# EAGLE board esquema_gps_usb (EAGLE 5.11)
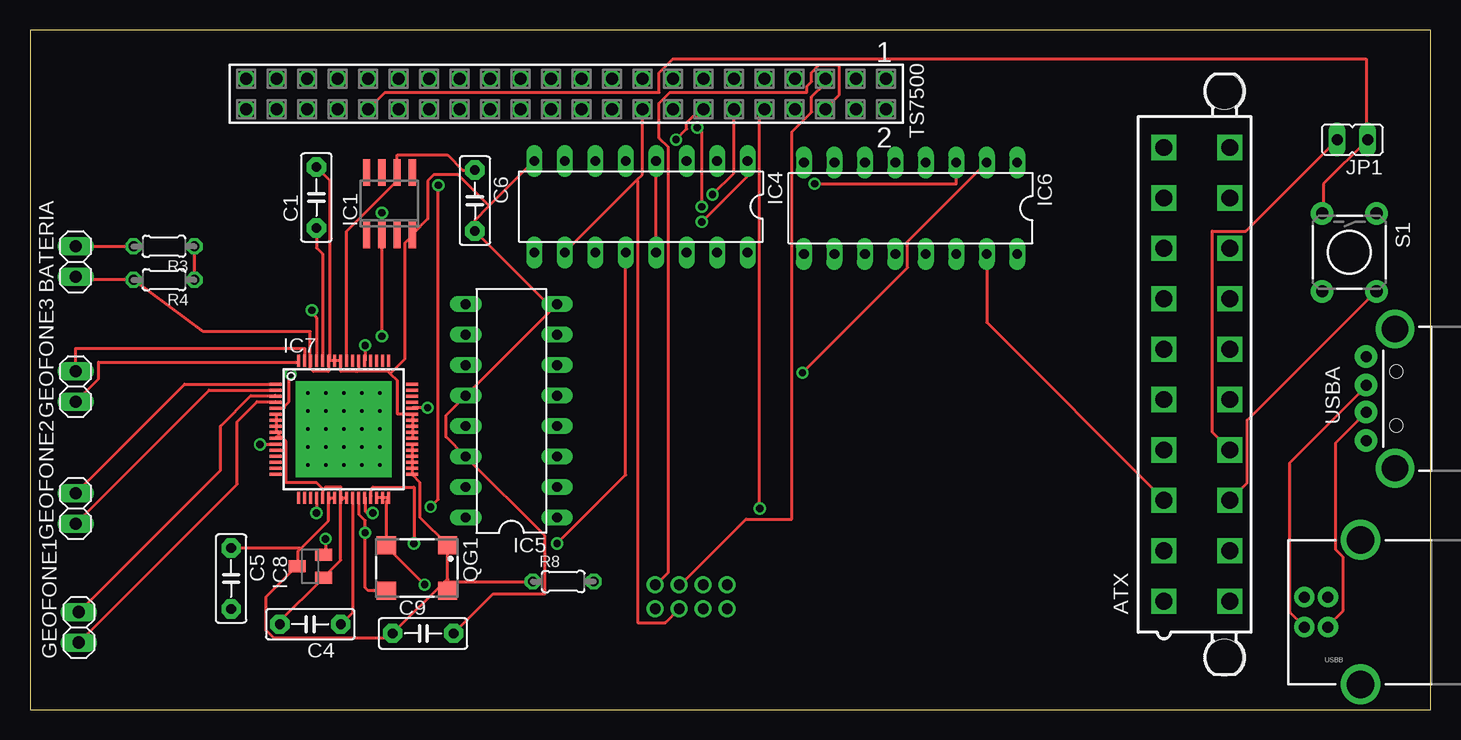
[diagram p0: board, top side]
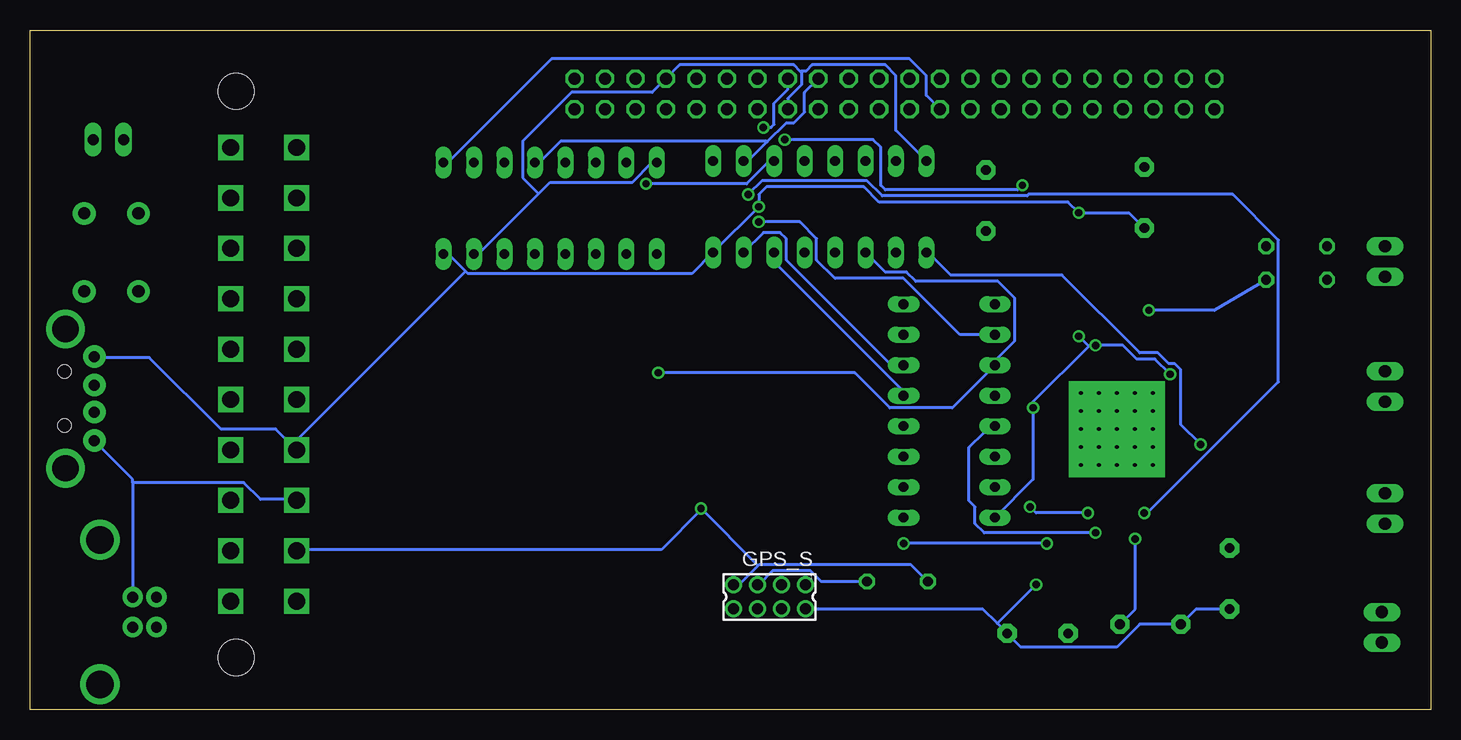
[diagram p1: board, bottom side, seen from below]

Size 116.76 x 56.63 mm. Coordinates in mm from the lower left corner, seen from the top.
Outline: 0,0 116.76,0 116.76,56.63 0,56.63 0,0
Copper layers (1*16): Top 0.035mm / dielectric 1.5mm / Bottom 0.035mm
Design rules "default": minimum track width 10mil, minimum drill 24mil, track to track 8mil, track to pad 8mil, pad to pad 8mil, via to via 8mil, smd to smd 8mil, copper to edge 40mil, drill to drill 8mil, minimum pad ring 10mil, minimum via ring 8mil, stop-mask expansion 4mil, vias tented up to drill 0mil, thermal gap 10mil

## Footprints (pad centres in the part's own frame; a part is rotated, then mirrored left to right if it is on the bottom)
5566-20 = drill 1.4 square: 1 18.9,-2.75; 2 14.7,-2.75; 3 10.5,-2.75; 4 6.3,-2.75; 5 2.1,-2.75; 6 -2.1,-2.75; 7 -6.3,-2.75; 8 -10.5,-2.75; 9 -14.7,-2.75; 10 -18.9,-2.75; 11 18.9,2.75; 12 14.7,2.75; 13 10.5,2.75; 14 6.3,2.75; 15 2.1,2.75; 16 -2.1,2.75; 17 -6.3,2.75; 18 -10.5,2.75; 19 -14.7,2.75; 20 -18.9,2.75 | hole 3: 23.6,2.29; -23.6,2.29
1X02 = drill 1.016 long: 1 -1.27,0; 2 1.27,0
C5B2.5 = drill 0.813 pad 1.6 octagon: 1 -2.54,0; 2 2.54,0
87758-0816 = drill 0.9 pad 1.27 round: 1 -3,-1; 2 -3,1; 3 -1,-1; 4 -1,1; 5 1,-1; 6 1,1; 7 3,-1; 8 3,1
SO08 = smd 0.6 x 2.2: 1 -1.905,-2.6; 2 -0.635,-2.6; 3 0.635,-2.6; 4 1.905,-2.6; 5 1.905,2.6; 6 0.635,2.6; 7 -0.635,2.6; 8 -1.905,2.6
DIL16 = drill 0.813 long: 1 -8.89,-3.81; 2 -6.35,-3.81; 3 -3.81,-3.81; 4 -1.27,-3.81; 5 1.27,-3.81; 6 3.81,-3.81; 7 6.35,-3.81; 8 8.89,-3.81; 9 8.89,3.81; 10 6.35,3.81; 11 3.81,3.81; 12 1.27,3.81; 13 -1.27,3.81; 14 -3.81,3.81; 15 -6.35,3.81; 16 -8.89,3.81
HTQFP-64-PAP = smd 1 x 0.25: 1 -5.7,3.75; 2 -5.7,3.25; 3 -5.7,2.75; 4 -5.7,2.25; 5 -5.7,1.75; 6 -5.7,1.25; 7 -5.7,0.75; 8 -5.7,0.25; 9 -5.7,-0.25; 10 -5.7,-0.75; 11 -5.7,-1.25; 12 -5.7,-1.75; 13 -5.7,-2.25; 14 -5.7,-2.75; 15 -5.7,-3.25; 16 -5.7,-3.75; 33 5.7,-3.75; 34 5.7,-3.25; 35 5.7,-2.75; 36 5.7,-2.25; 37 5.7,-1.75; 38 5.7,-1.25; 39 5.7,-0.75; 40 5.7,-0.25; 41 5.7,0.25; 42 5.7,0.75; 43 5.7,1.25; 44 5.7,1.75; 45 5.7,2.25; 46 5.7,2.75; 47 5.7,3.25; 48 5.7,3.75 | smd 0.25 x 1: 17 -3.75,-5.7; 18 -3.25,-5.7; 19 -2.75,-5.7; 20 -2.25,-5.7; 21 -1.75,-5.7; 22 -1.25,-5.7; 23 -0.75,-5.7; 24 -0.25,-5.7; 25 0.25,-5.7; 26 0.75,-5.7; 27 1.25,-5.7; 28 1.75,-5.7; 29 2.25,-5.7; 30 2.75,-5.7; 31 3.25,-5.7; 32 3.75,-5.7; 49 3.75,5.7; 50 3.25,5.7; 51 2.75,5.7; 52 2.25,5.7; 53 1.75,5.7; 54 1.25,5.7; 55 0.75,5.7; 56 0.25,5.7; 57 -0.25,5.7; 58 -0.75,5.7; 59 -1.25,5.7; 60 -1.75,5.7; 61 -2.25,5.7; 62 -2.75,5.7; 63 -3.25,5.7; 64 -3.75,5.7 | drill 0.3 pad 2 square: EXP1 -3,3; EXP2 -1.5,3; EXP3 0,3; EXP4 1.5,3; EXP5 3,3; EXP6 -3,1.5; EXP7 -1.5,1.5; EXP8 0,1.5; EXP9 1.5,1.5; EXP10 3,1.5; EXP11 -3,0; EXP12 -1.5,0; EXP13 0,0; EXP14 1.5,0; EXP15 3,0; EXP16 -3,-1.5; EXP17 -1.5,-1.5; EXP18 0,-1.5; EXP19 1.5,-1.5; EXP20 3,-1.5; EXP21 -3,-3; EXP22 -1.5,-3; EXP23 0,-3; EXP24 1.5,-3; EXP25 3,-3
SOT23 = smd 1 x 1.4: 1 -0.95,-1.1; 2 0.95,-1.1; 3 0,1.1
JP1 = drill 0.914 long: 1 0,-1.27; 2 0,1.27
SM77H = smd 1.6 x 1.5: 1 -2.55,-1.9; 2 2.55,-1.9; 3 2.55,1.9; 4 -2.55,1.9
0204/5 = drill 0.813 octagon: 1 -2.54,0; 2 2.54,0
TACTILE-PTH = drill 1.016 pad 1.88 round: 1 -3.251,2.261; 2 3.251,2.261; 3 -3.251,-2.261; 4 3.251,-2.261
SSW-122-02-S-D = drill 1 pad 1.5 octagon: 1 -26.67,-1.27; 2 -26.67,1.27; 3 -24.13,-1.27; 4 -24.13,1.27; 5 -21.59,-1.27; 6 -21.59,1.27; 7 -19.05,-1.27; 8 -19.05,1.27; 9 -16.51,-1.27; 10 -16.51,1.27; 11 -13.97,-1.27; 12 -13.97,1.27; 13 -11.43,-1.27; 14 -11.43,1.27; 15 -8.89,-1.27; 16 -8.89,1.27; 17 -6.35,-1.27; 18 -6.35,1.27; 19 -3.81,-1.27; 20 -3.81,1.27; 21 -1.27,-1.27; 22 -1.27,1.27; 23 1.27,-1.27; 24 1.27,1.27; 25 3.81,-1.27; 26 3.81,1.27; 27 6.35,-1.27; 28 6.35,1.27; 29 8.89,-1.27; 30 8.89,1.27; 31 11.43,-1.27; 32 11.43,1.27; 33 13.97,-1.27; 34 13.97,1.27; 35 16.51,-1.27; 36 16.51,1.27; 37 19.05,-1.27; 38 19.05,1.27; 39 21.59,-1.27; 40 21.59,1.27; 41 24.13,-1.27; 42 24.13,1.27; 43 26.67,-1.27; 44 26.67,1.27
USB-A-H = drill 0.914 pad 1.88 round: D+ 2.4,1.127; D- 2.4,-1.127; GND 2.4,3.5; VBUS 2.4,-3.5 | drill 2.2 round: GND2 0,-5.8; GND3 0,5.8 | hole 1.1: -0.1,2.25; -0.1,-2.25
USB-B-PTH = drill 0.914 pad 1.676 round: D+ 0,1.25; D- 1.981,1.25; GND 0,-1.25; VBUS 1.981,-1.25 | drill 2.286 round: S1 -2.718,-6.02; S2 -2.718,6.02

## Placement (x,y rotation side)
ATX  5566-20  [5566-20]  97.28,27.94 270 top
BATERIA  [1X02]  3.81,37.34 90 top
C1  1uF  [C5B2.5]  23.88,42.67 90 top
C4  10uF  [C5B2.5]  23.37,7.11 180 top
C5  10uF  [C5B2.5]  16.76,10.92 270 top
C6  10uF  [C5B2.5]  37.08,42.42 270 top
C9  0.1uF  [C5B2.5]  32.77,6.35 0 top
GEOFONE1  [1X02]  4.06,6.86 90 top
GEOFONE2  [1X02]  3.81,16.76 90 top
GEOFONE3  [1X02]  3.81,26.92 90 top
GPS_S  87758-0816  [87758-0816]  55.12,9.4 180 bottom
IC1  REF02D  [SO08]  29.97,42.16 0 top
IC4  4572N  [DIL16]  50.93,41.91 180 top
IC5  74AC590N  [DIL16]  40.13,24.89 90 top
IC6  74LS157N  [DIL16]  73.41,41.78 180 top
IC7  ADS1278  [HTQFP-64-PAP]  26.16,23.37 0 top
IC8  [SOT23]  23.37,11.94 90 top
JP1  [JP1]  110.24,47.5 90 top
QG1  SM77H  [SM77H]  32.26,11.81 180 top
R3  5k  [0204/5]  11.18,38.61 180 top
R4  1k  [0204/5]  11.18,35.81 180 top
R8  100k  [0204/5]  44.45,10.67 0 top
S1  [TACTILE-PTH]  109.98,38.1 270 top
TS7500  SSW-122-02-S-D  [SSW-122-02-S-D]  44.7,51.31 180 top
USBA  USB-A-H  [USB-A-H]  113.79,25.91 180 top
USBB  USBPTH  [USB-B-PTH]  108.2,8.13 180 top

## Library data of the parts
ATX = con-molex; OC_FARNELL: unknown; OC_NEWARK: unknown
BATERIA GEOFONE1-GEOFONE3 = pinhead
C1 C4-C6 C9 = capacitor-wima
GPS_S = con-molex; MF: MOLEX; MPN: 87758-0816; OC_FARNELL: 7472331; OC_NEWARK: 59J1556
IC1 = linear
IC4 = 45xx
IC5 IC6 = 74xx-eu
IC7 = texas; MPN: ADS1278IPAPT; OC_FARNELL: 1603419; OC_NEWARK: 50M8811
IC8 = v-reg
JP1 = jumper
QG1 = crystal; OC_FARNELL: unknown; OC_NEWARK: unknown
R3 R4 = rcl
R8 = resistor
S1 USBA USBB = SparkFun
TS7500 = con-samtec; MPN: SSW-122-02-S-D; OC_FARNELL: unknown; OC_NEWARK: 11P9673

## Nets
2.5V: C6.1 IC1.6 IC7.56
+1V8: C4.1 IC7.26 IC8.2
+3V3: ATX.2 C5.1 C9.1 GPS_S.7 IC7.22 IC7.23 IC7.33 IC7.34 IC7.35 IC7.36 IC7.37 IC7.38 IC8.3 QG1.1 QG1.4 R8.1 TS7500.10
+5V: ATX.4 C1.1 IC1.2 IC4.16 IC5.16 IC6.16 IC7.5 IC7.44 IC7.53 IC7.60 TS7500.15 USBA.VBUS
ADC_DATA: IC7.20 TS7500.12
CONT_144: IC4.3 IC6.3
CONT_RST: IC4.1 IC5.10
DR_INT: IC4.2 IC6.4 TS7500.17
FIRST_ADC_INT: IC4.11 IC5.11 IC6.2
GND: ATX.3 BATERIA.1 C1.2 C4.2 C5.2 C6.2 C9.2 GPS_S.2 IC1.4 IC4.8 IC5.8 IC5.12 IC5.14 IC6.8 IC6.15 IC7.6 IC7.7 IC7.8 IC7.9 IC7.10 IC7.12 IC7.21 IC7.24 IC7.25 IC7.30 IC7.31 IC7.32 IC7.39 IC7.40 IC7.41 IC7.42 IC7.43 IC7.54 IC7.57 IC7.58 IC7.59 IC7.62 IC8.1 QG1.2 R4.2 TS7500.7 TS7500.16 USBA.GND USBB.GND
GPS_PPS: GPS_S.4 IC4.10 TS7500.18
N$1: IC6.1 TS7500.26
N$2: IC4.15 IC5.6
N$3: IC4.14 IC5.5
N$4: IC4.9 IC7.11
N$5: IC4.4 IC4.13
N$6: JP1.1 S1.3 TS7500.36
N$7: IC4.12 IC7.29
N$8: GEOFONE1.2 IC7.3
N$9: ATX.13 S1.2
N$10: GEOFONE1.1 IC7.4
N$11: GEOFONE2.2 IC7.1
N$12: IC7.61 R3.1 R4.1
N$13: USBA.D- USBB.D-
N$14: GEOFONE3.2 IC7.63
N$15: GEOFONE3.1 IC7.64
N$17: IC5.13 IC7.27 QG1.3
N$18: USBA.D+ USBB.D+
N$19: BATERIA.2 R3.2
N$23: ATX.14 JP1.2
N$42: GPS_S.1 TS7500.6
N$43: GPS_S.3 TS7500.5
N$44: GPS_S.5 R8.2
N$46: GEOFONE2.1 IC7.2
SPI_CLOCK: IC7.28 TS7500.14

## Tracks (layer width: path | path; a pad name or v marks a point on that pad's centre or on a via)
2.5V
  Top 0.254: IC7.56 26.42,29.08 26.42,39.88 30.61,44.07 IC1.6 30.61,46.23 34.8,46.23 36.07,44.96 C6.1
+1V8  (via drill 0.61)
  Top 0.254: C4.1 26.92,8.13 26.92,17.65 IC7.26 | v24.64,14.22 24.64,13.08 24.51,12.95 IC8.2
  Bottom 0.254: v24.64,14.22 24.64,8.38 C4.1
+3V3  (via drill 0.61)
  Top 0.254: IC7.23 25.4,17.65 25.02,17.65 IC7.22 25.02,17.53 24.89,17.4 24.89,15.75 22.54,13.4 | 22.54,13.4 22.35,13.21 22.35,11.94 IC8.3 22.23,11.94 19.68,9.4 19.68,6.6 20.32,5.97 30.23,5.97 C9.1 34.8,10.92 | C5.1 22.48,13.46 22.54,13.4 | IC7.38 31.88,22.1 31.88,21.72 IC7.37 31.88,21.59 31.88,21.21 IC7.36 31.88,21.08 31.88,20.7 IC7.35 31.88,20.57 31.88,20.19 IC7.34 31.88,20.07 31.88,19.68 IC7.33 31.88,19.56 32.51,18.92 32.51,16 34.8,13.72 QG1.1 34.8,13.59 34.8,10.92 | 34.8,10.92 34.8,10.67 | 34.8,10.67 34.8,10.03 QG1.4 | 34.8,10.67 R8.1 | TS7500.10 60.83,49.66 v60.83,16.76
  Bottom 0.254: 56.07,12 56.01,12.06 43.31,12.06 R8.1 | 56.07,12 57.66,10.41 58.04,10.41 GPS_S.7 | 56.07,12 v60.83,16.76 60.83,16.64 64.14,13.34 94.49,13.34 ATX.2
+5V  (via drill 0.61)
  Top 0.254: C1.1 23.88,38.48 24.38,37.97 24.38,29.08 IC7.60 | v29.34,41.4 IC1.2 v29.34,31.11 | v21.72,27.94 21.59,27.81 21.59,25.65 21.21,25.27 21.21,25.15 20.57,25.15 IC7.5 | v27.94,30.35 27.94,29.08 IC7.53 | v33.15,25.15 31.88,25.15 IC7.44 | v55.63,48.51 56.01,48.13 v56.01,41.91
  Bottom 0.254: C1.1 25.15,41.4 v29.34,41.4 30.23,42.29 45.97,42.29 47.24,43.56 55.37,43.56 56.01,42.93 v56.01,41.91 IC4.16 61.59,36.32 80.26,36.32 80.45,36.51 | v21.72,27.94 22.99,29.21 24.51,29.21 25.65,30.35 v27.94,30.35 28.45,30.35 28.51,30.29 | 28.51,30.29 33.15,25.65 v33.15,25.15 33.15,19.18 IC5.16 | 28.51,30.29 v29.34,31.11 | USBA.VBUS 111.38,29.34 106.81,29.34 100.84,23.37 96.27,23.37 94.61,21.72 ATX.4 94.87,22.1 80.45,36.51 | IC6.16 81.92,37.97 80.45,36.51 | TS7500.15 53.59,51.69 54.74,50.55 54.74,48.77 54.99,48.51 v55.63,48.51
ADC_DATA  (via drill 0.61)
  Top 0.254: v23.88,16.38 23.88,17.65 IC7.20 | v56.9,42.93 58.67,44.7 TS7500.12
  Bottom 0.254: v23.88,16.38 23.62,16.38 12.7,27.3 12.7,39.12 16.51,42.93 33.53,42.93 33.66,42.8 45.72,42.8 46.99,44.07 55.75,44.07 v56.9,42.93
CONT_144  (via drill 0.61)
  Top 0.254: v65.41,43.81 77.22,43.81 IC6.3
  Bottom 0.254: IC4.3 55.12,45.72 57.02,43.81 v65.41,43.81
CONT_RST  (via drill 0.61)
  Top 0.254: v56.01,40.64 59.82,44.45 IC4.1
  Bottom 0.254: IC5.10 39.24,31.24 43.94,35.94 49.66,35.94 51.18,37.47 51.18,39.24 52.58,40.64 v56.01,40.64
DR_INT
  Bottom 0.254: IC4.2 56.9,45.72 55.31,47.31 | 55.31,47.31 53.72,48.9 53.09,48.9 52.2,49.78 52.2,51.44 TS7500.17 | IC6.4 74.3,45.59 72.52,47.37 55.37,47.37 55.31,47.31
FIRST_ADC_INT  (via drill 0.61)
  Top 0.254: IC6.2 73.15,38.99 73.15,36.83 v64.39,28.07
  Bottom 0.254: IC4.11 45.47,36.45 43.69,36.45 42.93,35.69 36.07,35.69 34.67,34.29 34.67,30.73 36.32,29.08 IC5.11 39.88,25.15 45.09,25.15 48.01,28.07 v64.39,28.07
GND  (via drill 0.61)
  Top 0.254: 24.45,18.35 24.64,18.54 25.91,18.54 25.91,17.78 IC7.24 | 24.45,18.35 24.38,18.29 24.38,17.78 IC7.21 | IC7.25 26.29,17.65 26.04,17.65 IC7.24 | IC7.6 20.57,24.51 20.57,24.13 IC7.7 20.57,24 20.57,23.62 IC7.8 20.57,23.5 20.57,23.24 IC7.9 20.57,23.11 20.77,22.92 | 21.34,21.59 20.57,21.59 IC7.12 | 21.34,21.59 21.34,22.35 20.77,22.92 | IC7.10 20.57,22.73 20.77,22.92 | 21.34,21.59 21.34,18.92 23.88,18.92 24.45,18.35 | C4.2 20.83,7.37 24.38,10.92 IC8.1 24.51,11.05 25.91,12.45 25.91,17.4 26.04,17.53 IC7.24 | IC7.30 28.96,17.65 29.34,17.65 IC7.31 29.46,17.65 29.84,17.65 IC7.32 29.84,17.53 29.72,17.4 QG1.2 29.72,13.59 v32.89,10.41 | BATERIA.1 3.81,35.81 R4.2 14.48,31.5 23.37,31.5 23.37,29.08 IC7.62 23.37,28.96 23.37,28.45 23.62,28.19 24.89,28.19 24.89,28.96 IC7.59 | IC7.39 31.88,22.73 31.88,23.11 IC7.40 31.88,23.24 31.88,23.5 IC7.41 31.88,23.62 31.88,24 IC7.42 31.88,24.13 31.88,24.51 IC7.43 31.75,24.64 30.61,24.64 30.61,27.43 30.04,28 | 27.24,28.26 27.18,28.19 25.91,28.19 25.91,28.96 IC7.57 25.91,29.08 25.53,29.08 IC7.58 25.4,29.08 25.02,29.08 IC7.59 | 27.24,28.26 27.43,28.45 27.43,28.96 IC7.54 | 30.04,28 29.84,28.19 27.3,28.19 27.24,28.26 | 30.04,28 31.24,29.21 31.24,38.86 31.88,39.5 IC1.4 31.88,39.62 33.15,40.89 33.15,44.07 33.66,44.58 35.69,44.58 38.29,41.97 | C1.2 25.02,44.07 25.02,29.21 IC7.59 | 38.29,41.97 37.08,40.77 C6.2 43.43,33.53 43.43,33.4 IC5.8 IC5.12 34.67,24.51 34.67,22.73 IC5.14 42.93,14.48 42.93,9.65 38.61,9.65 C9.2 | 38.29,41.97 IC4.8 | IC6.15 79.76,32.26 94.49,17.53 ATX.3
  Bottom 0.254: C5.2 19.56,8.38 C4.2 24.26,7.11 26.16,5.21 34.16,5.21 C9.2 36.13,7.18 | 36.13,7.18 37.34,8.38 52.07,8.38 GPS_S.2 | 36.13,7.18 v32.89,10.41 | 108.2,18.92 108.2,19.18 111.38,22.35 USBA.GND | 108.2,18.92 USBB.GND | 108.2,18.92 98.93,18.92 97.54,17.53 94.61,17.53 ATX.3 | IC6.15 79.38,37.97 74.36,42.99 | 74.36,42.99 73.41,43.94 66.55,43.94 64.9,45.59 IC6.8 | TS7500.16 53.59,50.93 52.45,52.07 52.45,53.09 52.51,53.15 | 52.51,53.15 53.09,53.72 62.61,53.72 TS7500.7 64.9,51.44 71.63,51.44 75.69,47.37 75.69,44.32 74.36,42.99 | IC4.8 44.58,48.26 44.58,52.83 45.47,53.72 51.56,53.72 52.07,53.21 52.45,53.21 52.51,53.15
GPS_PPS
  Top 0.254: 50.61,44.13 51.05,44.58 TS7500.18 | 50.61,44.13 IC4.10 | GPS_S.4 52.96,7.24 50.67,7.24 50.67,44.07 50.61,44.13
N$1
  Bottom 0.254: IC6.1 81.92,45.59 73.28,54.23 43.43,54.23 42.04,52.83 42.04,51.18 TS7500.26
N$2
  Bottom 0.254: IC5.6 44.96,28.7 53.72,37.47 53.72,39.24 54.23,39.75 55.63,39.75 IC4.15
N$3
  Bottom 0.254: IC5.5 43.94,26.54 54.74,37.34 IC4.14
N$4  (via drill 0.61)
  Top 0.254: v19.18,22.1 20.45,22.1 IC7.11
  Bottom 0.254: v19.18,22.1 20.83,23.75 20.83,28.32 21.34,28.83 21.84,28.83 22.73,29.72 24.26,29.72 30.73,36.2 40.01,36.2 41.91,38.1 IC4.9
N$5
  Top 0.254: IC4.13 IC4.4
N$6
  Top 0.254: S1.3 107.82,41.4 107.82,43.81 JP1.1 111.38,47.5 111.38,54.23 53.59,54.23 52.45,53.09 52.45,51.44 29.59,51.44 TS7500.36
N$7  (via drill 0.61)
  Top 0.254: v32,13.84 32,18.54 28.57,18.54 28.45,18.41 28.45,17.78 IC7.29 | v43.94,13.84 49.66,19.56 IC4.12
  Bottom 0.254: v32,13.84 v43.94,13.84
N$8
  Top 0.254: GEOFONE1.2 15.88,19.94 15.88,23.62 18.41,26.16 20.42,26.16 IC7.3 20.45,26.16
N$9
  Top 0.254: S1.2 112.14,34.8 101.47,24.13 101.47,18.92 100.08,17.53 ATX.13
N$10
  Top 0.254: IC7.4 20.45,25.65 18.92,25.65 17.27,24 17.27,18.8 GEOFONE1.1
  Bottom 0.254: GEOFONE1.1 4.19,5.59
N$11
  Top 0.254: GEOFONE2.2 12.89,27.12 IC7.1
N$12  (via drill 0.61)
  Top 0.254: v23.5,33.27 23.88,32.64 23.88,29.08 IC7.61 | R4.1 R3.1
  Bottom 0.254: v23.5,33.27 18.03,33.27 R4.1
N$13
  Top 0.254: USBB.D- 106.17,6.99 105.03,8.13 105.03,20.57 111.38,26.92 USBA.D-
N$14
  Top 0.254: GEOFONE3.2 3.81,30.1 22.91,30.1 IC7.63
N$15
  Top 0.254: GEOFONE3.1 5.71,27.56 5.71,28.96 22.35,28.96 IC7.64
N$17  (via drill 0.61)
  Top 0.254: IC7.27 27.43,17.65 27.43,16.26 27.94,15.75 v27.94,14.73 27.94,10.16 28.19,9.91 29.59,9.91 QG1.3
  Bottom 0.254: IC5.13 36.83,23.11 37.21,23.11 38.48,21.84 38.48,17.4 37.97,16.89 37.97,15.49 37.21,14.73 v27.94,14.73
N$18
  Top 0.254: USBB.D+ 108.2,6.99 109.47,8.26 109.47,12.7 108.84,13.34 108.84,22.23 111.38,24.77 USBA.D+
N$19
  Top 0.254: BATERIA.2 R3.2
N$23
  Top 0.254: JP1.2 101.35,39.88 98.55,39.88 98.55,23.11 99.95,21.72 ATX.14
N$42
  Top 0.254: TS7500.6 67.44,51.18 67.44,53.72 65.79,53.72 65.15,53.09 65.15,52.32 64.77,51.94 64.77,51.44 53.34,51.44 52.45,50.55 52.45,47.62 53.21,46.86 53.21,11.43 52.2,10.41 GPS_S.1
N$43
  Top 0.254: TS7500.5 66.29,52.2 65.15,51.05 65.15,49.78 63.5,48.13 63.5,15.88 59.69,15.88 54.23,10.41 GPS_S.3
N$44
  Bottom 0.254: R8.2 50.8,10.67 51.69,11.56 54.86,11.56 56.01,10.41 GPS_S.5
N$46
  Top 0.254: GEOFONE2.1 14.93,26.62 IC7.2
SPI_CLOCK  (via drill 0.61)
  Top 0.254: v28.57,16.38 28.07,16.38 27.94,16.51 27.94,17.65 IC7.28 | v33.4,16.89 34.04,17.53 v34.04,43.69 | v53.85,47.5 54.74,48.39 54.74,48.9 55.24,49.4 56.13,49.4 TS7500.14
  Bottom 0.254: v28.57,16.38 32.89,16.38 v33.4,16.89 | v34.04,43.69 34.42,43.31 45.47,43.31 45.85,43.69 45.85,46.86 46.48,47.5 v53.85,47.5